# Altium PCB PCB_Project.PcbDoc
Units mil, origin at the board's own origin, x right, y up, seen from the top; angles counter-clockwise.
Board outline 3385.11 x 2135.23 mil, 2 copper layers (Top Layer, Bottom Layer); 3 components, 2 nets, 14 pads, 2 vias.
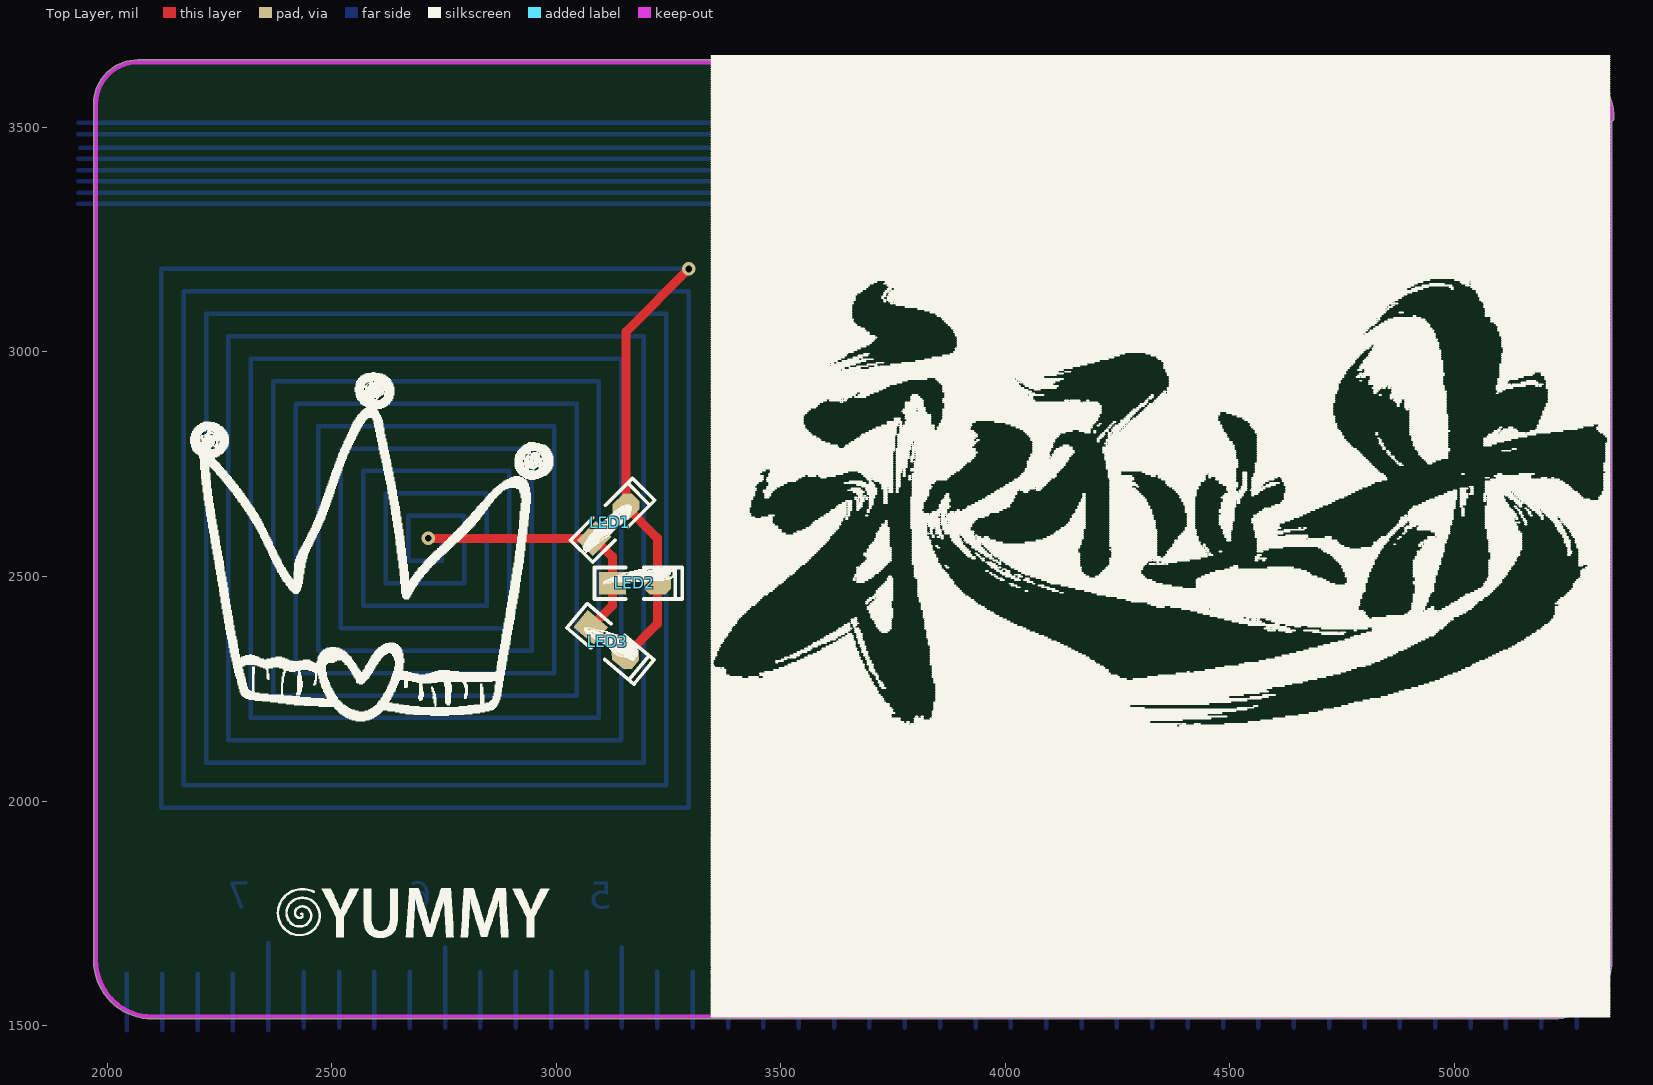
[diagram p0: Top Layer view]
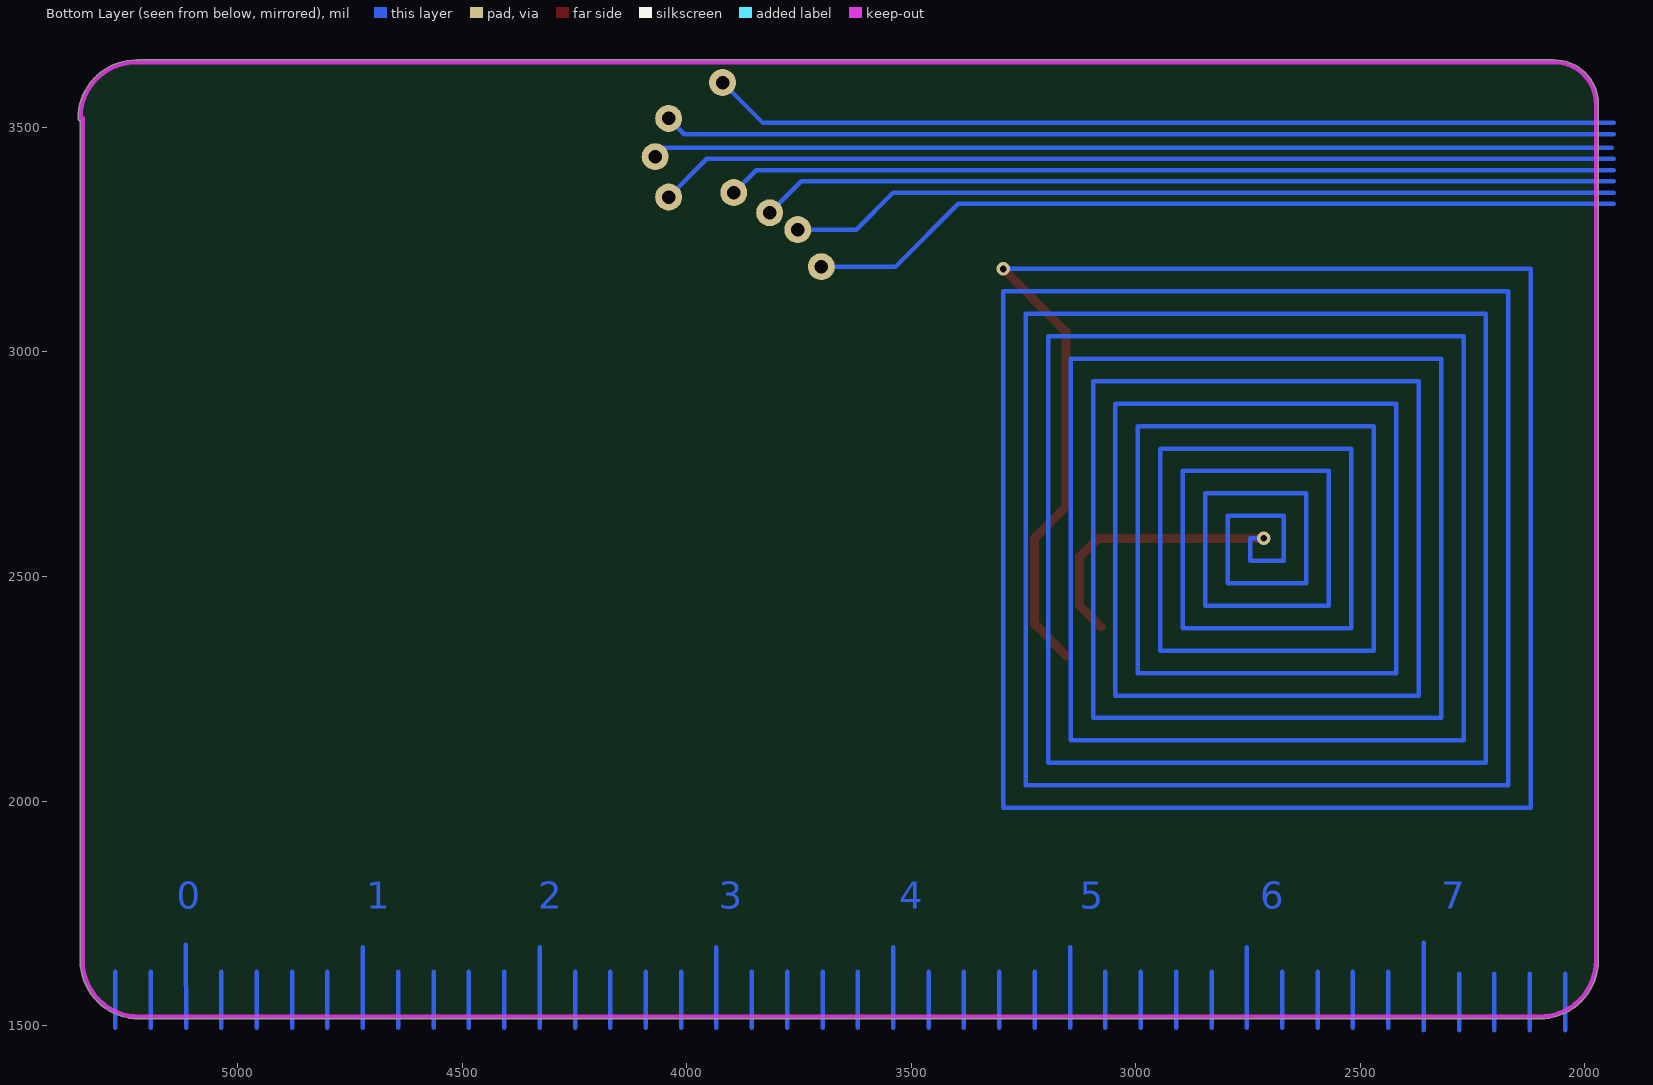
[diagram p1: Bottom Layer view, seen from below]
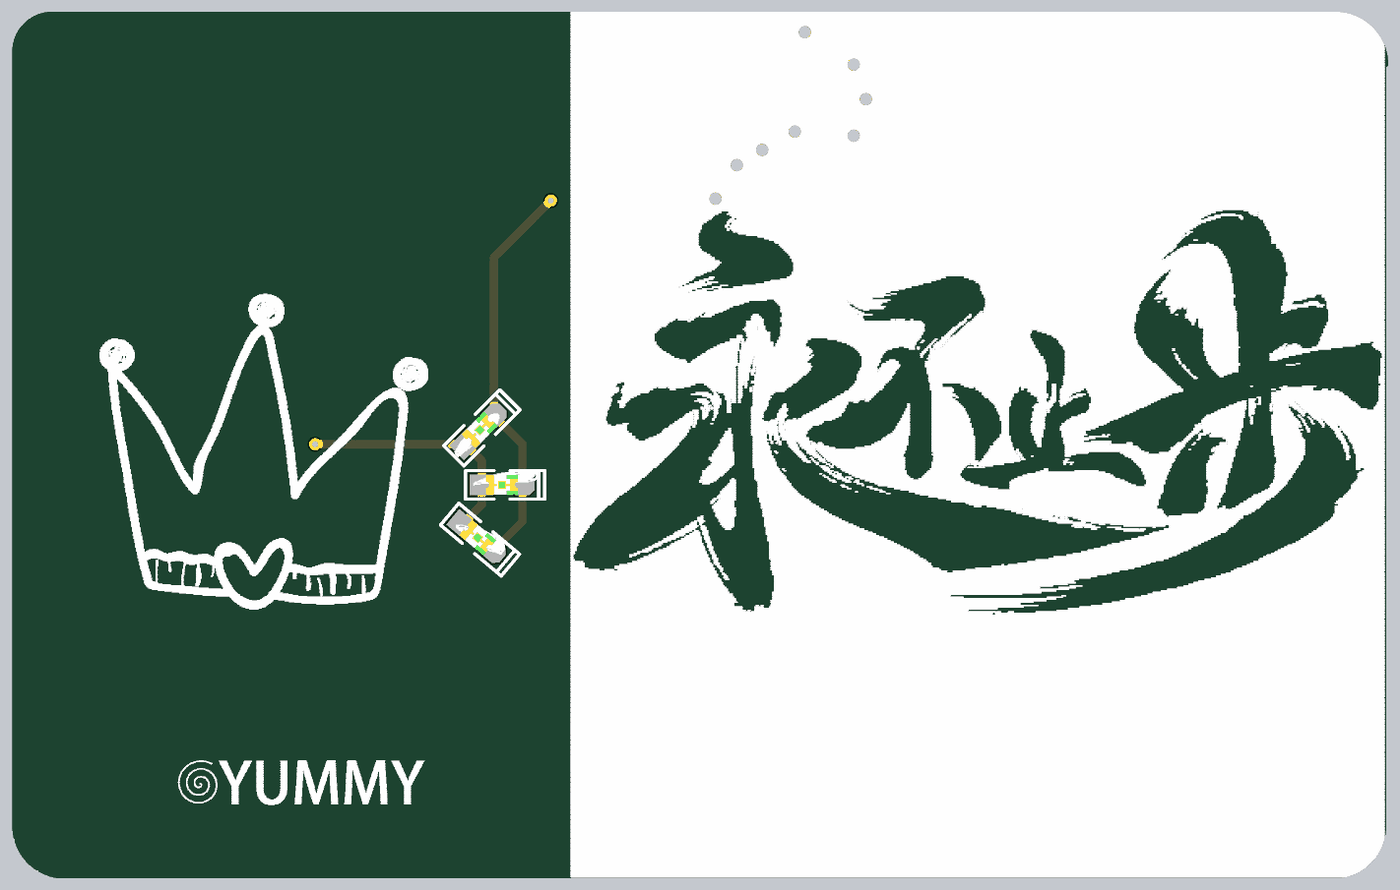
[diagram p2: 3D render of the assembled board from above, using the file's embedded part models]

## Layer stack, top to bottom
Top Solder: solder mask 0.4, Solder Resist, Dk 3.5
Top Layer: signal copper 1.4
Dielectric 1: dielectric 12.6, FR-4, Dk 4.8
Bottom Layer: signal copper 1.4
Bottom Solder: solder mask 0.4, Solder Resist, Dk 3.5

## Board outline
1969.98,1645.2 ccw(c2100.2,1645.2) 2100.2,1514.98 5219.85,1514.99 ccw(c5219.88,1520) 5219.88,1514.98 ccw(c5219.88,1645.2) 5350.09,1645.2 5350.09,3514.98 ccw(c5350.08,3520) 5355.09,3520 ccw(c5224.88,3520) 5224.88,3650.21 ccw(c5224.88,3645.2) 5222.38,3649.54 ccw(c5219.88,3645.2) 5219.88,3650.21 2067.72,3650.21 ccw(c2067.72,3552.48) 1969.98,3552.48

## Design rules (kind name [scope] priority, off if disabled: settings)
Clearance [All] p1: gap=10
PolygonConnect [All] p1: connectstyle=Relief reliefconductorwidth=10 reliefentries=4 polygonreliefangle="90 Angle" airgapwidth=10
RoutingVias [All] p1: holewidth=28 width=50 viastyle="Through Hole" minholewidth=28 minwidth=50 maxholewidth=28 maxwidth=50
SolderMaskExpansion [All] p1: expansion=4
Width [All] p1: maxlimit=100 minlimit=10 preferedwidth=30 minimp=50.000000 maximp=50.000000 favimp=50.000000
29 further rules are at their usual default settings.

## Components (designator, comment, footprint, x,y, rotation, side; value= is the part's Value field where it differs from the comment)
LED1 "红色" "LED 0805B" 3120,2620 r45 top
LED2 "红色" "LED 0805B" 3175,2485 r0 top
LED3 "红色" "LED 0805B" 3115,2355 r320 top

## Footprints (in the part's own frame and the unit in brackets; to place one, negate y for a bottom-side part, rotate by r counter-clockwise, add the part's x,y. Pads: shape width x height; smd on the part's side, far side on the other; paste and mask are expansions set on the pad)
"LED 0805B" [mil] "蓝色0805LED"
  rect 60x50 smd: 1(-50,0)
  oct 60x50 smd: 2(50,0)
  silkscreen extent -90,-35 105,35, body extent -39,-25 39,25, height 32

## Part data
LED1 LED2 LED3: library part LED-SMD, "贴片LED"

## Free pads (board coordinates)
  round 60 hole 30: 0(3700,3190) 1(3752.5,3272.5) 2(3815,3310) 3(3895,3355) 4(4040,3345) 5(4070,3435) 6(4040,3520) 7(3920,3600)

## Via types
v1: diameter 30, hole 15, Top Layer to Bottom Layer, 2 vias

## Nets (pads, with @x,y where several pads share a name; then routed paths per layer and width w, separated by ;. In a path a pad name is that pad's centre, name@x,y a point inside that pad or via, vN(x,y) a via of type N, cw(c..) or ccw(c..) an arc to the next point about the centre after c; other vN are vias at no path point)
GND: LED1.2 LED2.2 LED3.2 | length 978.5
  Top Layer w20: LED3.2 3225,2394.56 LED2.2 3225,2585.71 LED1.2 3155.36,3045.36 v1(3295,3185)
VCC: LED1.1 LED2.1 LED3.1 | length 604
  Top Layer w20: v1(2715,2585) 3084.29,2585 LED1.1 3125,2544.29 LED2.1 3125,2435.44 LED3.1
copper on no net: | length 59060.5
  Bottom Layer w10: 1935,3330 3395,3330 3535,3190 3700,3190 ; 1935,3380 3705,3380 3745,3380 3815,3310 ; 1935,3430 2205,3430 3770,3430 3950,3430 3955,3430 4040,3345 ; 1935,3485 3870,3485 ; 2043.74,1490 2043.74,1615 ; 2122.48,1490 2122.48,1615 ; 2201.22,1490 2201.22,1615 ; 2279.96,1490 2279.96,1615 ; 2358.7,1490 2358.7,1685 ; 2437.44,1495 2437.44,1620 ; 2516.18,1495 2516.18,1620 ; 2594.92,1495 2594.92,1620 ; 2673.66,1495 2673.66,1620 ; 2720,2585 2745,2585 2745,2540 2745,2535 2695,2535 2670,2535 2670,2635 2795,2635 2795,2485 2620,2485 2620,2685 2845,2685 2845,2435 2570,2435 2570,2735 2895,2735 2895,2385 2520,2385 2520,2760 2520,2785 2945,2785 2945,2335 2470,2335 2470,2835 2995,2835 2995,2285 2420,2285 2420,2860 2420,2885 3045,2885 3045,2235 2370,2235 2370,2910 2370,2935 3095,2935 3095,2185 2320,2185 2320,2985 3145,2985 3145,2135 2270,2135 2270,3035 3195,3035 3195,2085 2220,2085 2220,3085 3245,3085 3245,2035 2170,2035 2170,3135 3295,3135 3295,1985 2120,1985 2120,3185 3300,3185 ; 2752.4,1495 2752.4,1675 ; 2831.14,1495 2831.14,1620 ; 2909.88,1495 2909.88,1620 ; 2988.62,1495 2988.62,1620 ; 3067.36,1495 3067.36,1620 ; 3146.1,1495 3146.1,1675 ; 3224.84,1495 3224.84,1620 ; 3303.58,1495 3303.58,1620 ; 3382.32,1495 3382.32,1620 ; 3461.06,1495 3461.06,1620 ; 3539.8,1495 3539.8,1675 ; 3618.54,1495 3618.54,1620 ; 3697.28,1495 3697.28,1620 ; 3752.5,3272.5 3622.5,3272.5 3540,3355 3435,3355 ; 3776.02,1495 3776.02,1620 ; 3854.76,1495 3854.76,1620 ; 3855,3485 4005,3485 4035,3515 ; 3895,3355 3845,3405 3555,3405 ; 3920,3600 3830,3510 3720,3510 ; 3933.5,1495 3933.5,1675 ; 4012.24,1495 4012.24,1620 ; 4080,3440 4065,3455 3620,3455 ; 4090.98,1495 4090.98,1620 ; 4169.72,1495 4169.72,1620 ; 4248.46,1495 4248.46,1620 ; 4327.2,1495 4327.2,1675 ; 4405.94,1495 4405.94,1620 ; 4484.69,1495 4484.69,1620 ; 4563.43,1495 4563.43,1620 ; 4642.17,1495 4642.17,1620 ; 4720.91,1495 4720.91,1675 ; 4799.65,1495 4799.65,1620 ; 4878.39,1495 4878.39,1620 ; 4957.13,1495 4957.13,1620 ; 5035.87,1495 5035.87,1620 ; 5193.35,1495 5193.35,1620 ; 5272.09,1495 5272.09,1620 ; 3435,3355 1935,3355 3435,3355 ; 3555,3405 1935,3405 3555,3405 ; 3620,3455 1940,3455 3620,3455 ; 3720,3510 1935,3510 3720,3510 ; 5114.61,1495 5115,1680 5114.61,1495

## Keep-outs
Keep-Out Layer:
  lines w10: 5219.88,3645.2 2067.72,3645.2 ccw(c2067.72,3552.48) 1975,3552.48 1975,1645.2 ccw(c2100.2,1645.2) 2100.2,1520 5219.88,1520 ccw(c5219.88,1645.2) 5345.08,1645.2 5345.08,3520 ; 5224.88,3645.2 cw(c5224.88,3520) 5350.08,3520

## Other copper
Bottom Layer:
  text "0" at 5135,1820 h60 r180
  text "7" at 2320,1760.02 h60
  text "6" at 2722.14,1760.02 h60
  text "5" at 3124.29,1760.02 h60
  text "4" at 3526.43,1760.02 h60
  text "3" at 3928.57,1760.02 h60
  text "2" at 4330.71,1760.02 h60
  text "1" at 4712.86,1760.02 h60

## Silkscreen, mask and mechanical layers (free items; w line width, h text height)
Top Overlay:
  drawing of 6312 lines, arcs and shapes, not listed
Bottom Solder:
  lines w10: 1935,3330 3395,3330 3535,3190 3700,3190 ; 1935,3380 3705,3380 3745,3380 3815,3310 ; 1935,3430 2205,3430 3770,3430 3950,3430 3955,3430 4040,3345 ; 1935,3485 3870,3485 ; 2043.74,1490 2043.74,1615 ; 2122.48,1490 2122.48,1615 ; 2201.22,1490 2201.22,1615 ; 2279.96,1490 2279.96,1615 ; 2358.7,1490 2358.7,1685 ; 2437.44,1495 2437.44,1620 ; 2516.18,1495 2516.18,1620 ; 2594.92,1495 2594.92,1620 ; 2673.66,1495 2673.66,1620 ; 2752.4,1495 2752.4,1675 ; 2831.14,1495 2831.14,1620 ; 2909.88,1495 2909.88,1620 ; 2988.62,1495 2988.62,1620 ; 3067.36,1495 3067.36,1620 ; 3146.1,1495 3146.1,1675 ; 3224.84,1495 3224.84,1620 ; 3303.58,1495 3303.58,1620 ; 3382.32,1495 3382.32,1620 ; 3461.06,1495 3461.06,1620 ; 3539.8,1495 3539.8,1675 ; 3618.54,1495 3618.54,1620 ; 3697.28,1495 3697.28,1620 ; 3752.5,3272.5 3622.5,3272.5 3540,3355 3435,3355 ; 3776.02,1495 3776.02,1620 ; 3854.76,1495 3854.76,1620 ; 3855,3485 4005,3485 4035,3515 ; 3895,3355 3845,3405 3555,3405 ; 3920,3600 3830,3510 3720,3510 ; 3933.5,1495 3933.5,1675 ; 4012.24,1495 4012.24,1620 ; 4080,3440 4065,3455 3620,3455 ; 4090.98,1495 4090.98,1620 ; 4169.72,1495 4169.72,1620 ; 4248.46,1495 4248.46,1620 ; 4327.2,1495 4327.2,1675 ; 4405.94,1495 4405.94,1620 ; 4484.69,1495 4484.69,1620 ; 4563.43,1495 4563.43,1620 ; 4642.17,1495 4642.17,1620 ; 4720.91,1495 4720.91,1675 ; 4799.65,1495 4799.65,1620 ; 4878.39,1495 4878.39,1620 ; 4957.13,1495 4957.13,1620 ; 5035.87,1495 5035.87,1620 ; 5193.35,1495 5193.35,1620 ; 5272.09,1495 5272.09,1620 ; 3435,3355 1935,3355 3435,3355 ; 3555,3405 1935,3405 3555,3405 ; 3620,3455 1940,3455 3620,3455 ; 3720,3510 1935,3510 3720,3510 ; 5114.61,1495 5115,1680 5114.61,1495
  text "0" at 5135,1820 h60 r180
  text "7" at 2320,1760.02 h60
  text "6" at 2722.14,1760.02 h60
  text "5" at 3124.29,1760.02 h60
  text "4" at 3526.43,1760.02 h60
  text "3" at 3928.57,1760.02 h60
  text "2" at 4330.71,1760.02 h60
  text "1" at 4712.86,1760.02 h60